# Altium PCB Schroom_plocica.PcbDoc
Units mm, origin at the board's own origin, x right, y up, seen from the top; angles counter-clockwise.
Board outline 152.4 x 101.6 mm, 2 copper layers (Top Layer, Bottom Layer); 54 components, 43 nets, 200 pads, 48 vias.
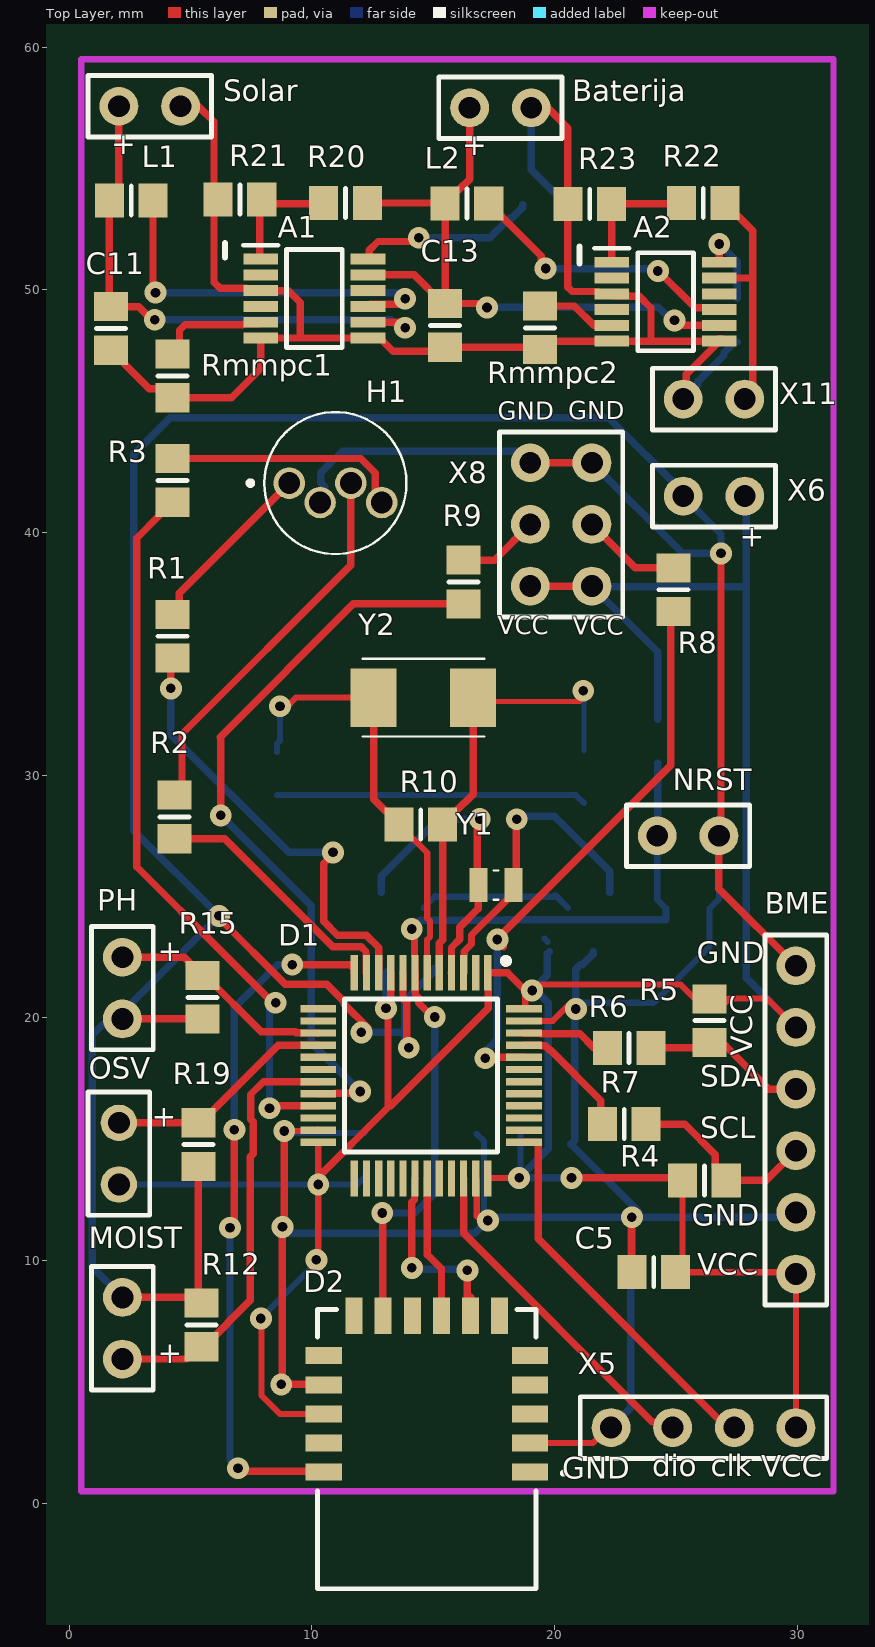
[diagram p0: Top Layer view]
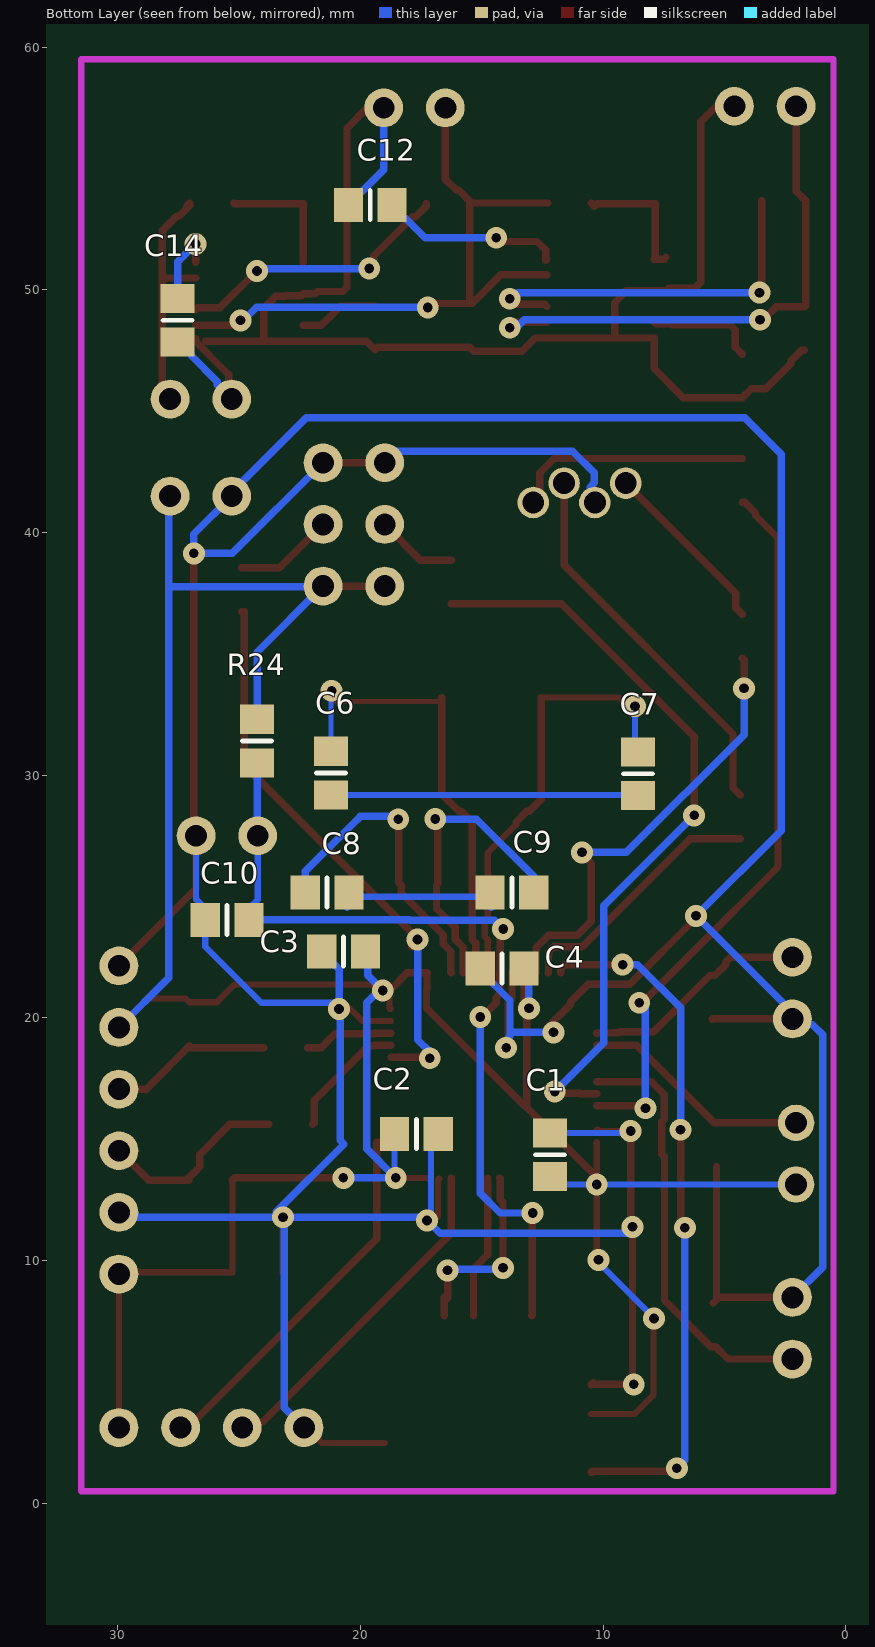
[diagram p1: Bottom Layer view, seen from below]

## Layer stack, top to bottom
Top Solder: solder mask 0.0102, Solder Resist, Dk 3.5
Top Layer: signal copper 0.0356
Dielectric 1: dielectric 0.32, FR-4, Dk 4.8
Bottom Layer: signal copper 0.0356
Bottom Solder: solder mask 0.0102, Solder Resist, Dk 3.5

## Board outline
-30.1,-31.347 122.3,-31.347 122.3,70.253 -30.1,70.253

## Design rules (kind name [scope] priority, off if disabled: settings)
Clearance [All] p1: gap=0.178 ignorepadtopadclearanceinfootprint=TRUE
PolygonConnect [All] p1: connectstyle=Relief reliefconductorwidth=0.254 reliefentries=4 polygonreliefangle="90 Angle" airgapwidth=0.254
RoutingVias [All] p1: holewidth=0.711 width=1.27 viastyle="Through Hole" minholewidth=0.711 minwidth=1.27 maxholewidth=0.711 maxwidth=1.27
SolderMaskExpansion [All] p1: expansion=0.102 istentingtop=FALSE
Width [All] p1: maxlimit=1.016 minlimit=0.203 preferedwidth=0.305 minimp=50.000000 maximp=50.000000 favimp=50.000000
30 further rules are at their usual default settings.

## Components (designator, comment, footprint, x,y, rotation, side; value= is the part's Value field where it differs from the comment)
A1 "LTC3105" SOP65P490X110-12N 10.101,49.64 r0 top
A2 "LTC3105" SOP65P490X110-12N 24.577,49.511 r0 top
Baterija "Baterija" HDR1X2#1 19.04,57.5 r180 top (schematic designator X10)
BME "BME280" HDR1X6 29.947,9.449 r90 top (schematic designator X1)
C1 "100n" 6-0805_N 12.192,14.362 r270 bottom value=100pF
C2 "100n" 6-0805_N 17.693,15.215 r0 bottom value=100pF
C3 "100n" 6-0805_N 20.69,22.733 r180 bottom value=100pF
C4 "10n" 6-0805_N 14.159,22.047 r180 bottom value=100pF
C5 "100n" 6-0805_N 24.09,9.525 r0 top value=100pF
C6 "12p5" 6-0805_N 21.209,30.088 r90 bottom value=100pF
C7 "12p5" 6-0805_N 8.56,30.063 r90 bottom value=100pF
C8 "12p5" 6-0805_N 21.372,25.171 r0 bottom value=100pF
C9 "12p5" 6-0805_N 13.756,25.171 r180 bottom value=100pF
C10 "100n" 6-0805_N 25.491,24.04 r180 bottom value=100pF
C11 "10u" 6-0805_N 1.719,48.409 r90 top value=100pF
C12 "1u" 6-0805_N 19.591,53.5 r180 bottom value=100pF
C13 "10u" 6-0805_N 15.491,48.536 r90 top value=100pF
C14 "1u" 6-0805_N 27.528,48.749 r90 bottom value=100pF
D1 "STM32F103C8T6" QFP50P900X900X160-48N 14.502,17.627 r270 top
D2 "RN4871-I_RM128" RN4871 14.74,7.983 r180 top
H1 "RGB LED" HV5RGB25 9.068,42.037 r0 top
L1 "10u" 6-0805_N 2.557,53.678 r0 top value=10mH
L2 "10u" 6-0805_N 16.391,53.551 r0 top value=10mH
MOIST "vlaga" HDR1X2#1 2.197,5.947 r90 top (schematic designator X2)
NRST "NRST" HDR1X2#1 24.232,27.508 r0 top (schematic designator X7)
OSV "10k" HDR1X2#2 2.049,15.68 r270 top value=1K (schematic designator R18)
PH "PH" HDR1X2#1 2.197,22.5 r270 top (schematic designator X3)
R1 "1k" 6-0805_N 4.267,35.727 r90 top value=1K
R2 "2k" 6-0805_N 4.343,28.285 r270 top value=1K
R3 "3k" 6-0805_N 4.267,42.15 r270 top value=1K
R4 "4k7" 6-0805_N 26.173,13.31 r180 top value=1K
R5 "4k7" 6-0805_N 26.391,19.888 r90 top value=1K
R6 "0.1k" 6-0805_N 23.074,18.771 r0 top value=1K
R7 "0.1K" 6-0805_N 22.871,15.621 r0 top value=1K
R8 "100k" 6-0805_N 24.892,37.643 r270 top value=1K
R9 "100k" 6-0805_N 16.256,37.962 r90 top value=1K
R10 "1M" 6-0805_N 14.489,27.965 r180 top value=1K
R12 "700" 6-0805_N 5.461,7.355 r90 top value=1K
R15 "700" 6-0805_N 5.5,20.85 r270 top value=1K
R19 "10k" 6-0805_N 5.326,14.78 r90 top value=1K
R20 "1M" 6-0805_N 11.386,53.577 r0 top value=1K
R21 "301k" 6-0805_N 7.036,53.721 r180 top value=1K
R22 "1M" 6-0805_N 26.126,53.577 r0 top value=1K
R23 "437k" 6-0805_N 21.452,53.543 r180 top value=1K
R24 "4k7" 6-0805_N 24.257,31.405 r270 bottom value=1K
Rmmpc1 "400k" 6-0805_N 4.259,46.454 r90 top value=1K
Rmmpc2 "0" 6-0805_N 19.398,48.435 r90 top value=1K
Solar "Solar" HDR1X2#1 4.589,57.564 r180 top (schematic designator X9)
X5 "Programator" HDR1X4 29.947,3.124 r180 top
X6 "Ulaz_3,3V" HDR1X2#1 27.84,41.5 r180 top
X8 "Header 3X2" HDR2X3 21.539,37.795 r90 top
X11 "izlaz 3,3V" HDR1X2#1 25.3,45.5 r0 top
Y1 "ABS06-127-32.768KHZ-T" ABS0612732768KHZT 17.587,25.475 r180 top
Y2 "CX5032GA08000H0PST02" CX5032GA08000H0PST02 14.598,33.198 r180 top

## Footprints (in the part's own frame and the unit in brackets; to place one, negate y for a bottom-side part, rotate by r counter-clockwise, add the part's x,y. Pads: shape width x height; smd on the part's side, far side on the other; paste and mask are expansions set on the pad)
6-0805_N [mm] "Chip Resistor, Body 2.0x1.2mm, IPC Medium Density"
  rect 1.2x1.4 smd: 1(-0.9,0) 2(0.9,0)
  silkscreen extent 0,-0.6 0,0.6, body extent -1.07,-0.7 1.07,0.7, height 0.7
ABS0612732768KHZT [mm]
  rect 0.75x1.4 smd: 1(-0.725,0) 2(0.725,0)
  silkscreen extent -0.1,-0.6 0.1,0.6
CX5032GA08000H0PST02 [mm]
  rect 1.9x2.4 smd: 1(-2.05,0) 2(2.05,0)
  silkscreen extent -2.5,-1.6 2.5,1.6, body extent -2.81,-1.6 2.81,1.6, height 1.1
HDR1X2#1 [mm] "Connector; Header; 2 Position"
  round 1.6 hole 0.9: 1(0,0) 2(2.54,0)
  silkscreen extent -1.27,-1.27 3.81,1.27
HDR1X2#2 [mm] "Connector; Header; 2 Position"
  round 1.5 hole 0.9: 1(0,0) 2(2.54,0)
  silkscreen extent -1.27,-1.27 3.81,1.27
HDR1X4 [mm] "Connector; Header; 4 Position"
  round 1.6 hole 0.9: 1(0,0) 2(2.54,0) 3(5.08,0) 4(7.62,0)
  silkscreen extent -1.27,-1.27 8.89,1.27
HDR1X6 [mm] "Connector; Header; 6 Position"
  round 1.6 hole 0.9: 1(0,0) 2(2.54,0) 3(5.08,0) 4(7.62,0) 5(10.16,0) 6(12.7,0)
  silkscreen extent -1.27,-1.27 13.97,1.27
HDR2X3 [mm] "Connector; Header; 3x2 Position"
  round 1.6 hole 0.9: 1(0,0) 2(0,2.54) 3(2.54,0) 4(2.54,2.54) 5(5.08,0) 6(5.08,2.54)
  silkscreen extent -1.27,-1.27 6.35,3.81
HV5RGB25 [mm]
  round 1.3 hole 0.9: 1(0,0) 2(1.27,-0.8) 3(2.54,0) 4(3.81,-0.8)
  silkscreen extent -1.7,-2.92 4.83,2.92
QFP50P900X900X160-48N [mm]
  rect 1.475x0.3 smd: 1(-4.238,2.75) 2(-4.238,2.25) 3(-4.238,1.75) 4(-4.238,1.25) 5(-4.238,0.75) 6(-4.238,0.25) 7(-4.238,-0.25) 8(-4.238,-0.75) 9(-4.238,-1.25) 10(-4.238,-1.75) 11(-4.238,-2.25) 12(-4.238,-2.75) 25(4.238,-2.75) 26(4.238,-2.25) 27(4.238,-1.75) 28(4.238,-1.25) 29(4.238,-0.75) 30(4.238,-0.25) 31(4.238,0.25) 32(4.238,0.75) 33(4.238,1.25) 34(4.238,1.75) 35(4.238,2.25) 36(4.238,2.75)
  rect 0.3x1.475 smd: 13(-2.75,-4.238) 14(-2.25,-4.238) 15(-1.75,-4.238) 16(-1.25,-4.238) 17(-0.75,-4.238) 18(-0.25,-4.238) 19(0.25,-4.238) 20(0.75,-4.238) 21(1.25,-4.238) 22(1.75,-4.238) 23(2.25,-4.238) 24(2.75,-4.238) 37(2.75,4.238) 38(2.25,4.238) 39(1.75,4.238) 40(1.25,4.238) 41(0.75,4.238) 42(0.25,4.238) 43(-0.25,4.238) 44(-0.75,4.238) 45(-1.25,4.238) 46(-1.75,4.238) 47(-2.25,4.238) 48(-2.75,4.238)
  silkscreen extent -4.85,-3.15 3.15,3.63, body extent -4.5,-4.5 4.5,4.5, height 1.6
RN4871 [mm]
  rect 1.5x0.7 smd: 1(-4.25,6.7) 2(-4.25,5.5) 3(-4.25,4.3) 4(-4.25,3.1) 5(-4.25,1.9) 12(4.25,1.9) 13(4.25,3.1) 14(4.25,4.3) 15(4.25,5.5) 16(4.25,6.7)
  rect 0.7x1.5 smd: 6(-3,0.25) 7(-1.8,0.25) 8(-0.6,0.25) 9(0.6,0.25) 10(1.8,0.25) 11(3,0.25)
  silkscreen extent -5.67,0 4.5,11.5
SOP65P490X110-12N [mm]
  rect 1.425x0.45 smd: 1(-2.212,1.625) 2(-2.212,0.975) 3(-2.212,0.325) 4(-2.212,-0.325) 5(-2.212,-0.975) 6(-2.212,-1.625) 7(2.212,-1.625) 8(2.212,-0.975) 9(2.212,-0.325) 10(2.212,0.325) 11(2.212,0.975) 12(2.212,1.625)
  silkscreen extent -2.93,-2.02 1.15,2.2, body extent -2.45,-2.02 2.45,2.02, height 1.1

## Part data
Baterija MOIST PH Solar X6 X11: library part "Header 2", "Header, 2-Pin", LatestRevisionDate=17-Jul-2002, LatestRevisionNote="Re-released for DXP Platform.", Publisher="Altium Limited"
C1 C2 C3 C4 C5 C6 C7 C8 C9 C10 C11 C12 C13 C14: library part Cap, "Capacitor", LatestRevisionDate=17-Jul-2002, LatestRevisionNote="Re-released for DXP Platform.", PackageDescription="Radial Cap, Thru-Hole; 2 Leads; 0.3 in Pin Spacing", PackageReference=RAD-0.3, Published=8-Jun-2000, Publisher="Altium Limited"
D1: "Integrated Circuit", Manufacturer_Name=STMicroelectronics, Mouser Part Number=511-STM32F103C8T6, RS Part Number=0402279P, Allied_Number=70390993, Allied Price/Stock=http://www.alliedelec.com/stmicroelectronics-stm32f103c8t6/70390993/, Datasheet Link=http://www.st.com/st-web-ui/static/active/en/resource/technical/document/datasheet/CD00161566.pdf, Height=1.6mm, Manufacturer_Part_Number=STM32F103C8T6, Mouser Price/Stock=https://www.mouser.com/Search/Refine.aspx?Keyword=511-STM32F103C8T6, RS Price/Stock=http://uk.rs-online.com/web/p/products/0402279P
D2: "Integrated Circuit", Manufacturer_Name=Microchip, Manufacturer_Part_Number=RN4871-I/RM128, Mouser Part Number=579-RN4871-I/RM128, RS Part Number=1372666P, Datasheet Link=http://ww1.microchip.com/downloads/en/DeviceDoc/50002489C.pdf, Mouser Price/Stock=https://www.mouser.com/Search/Refine.aspx?Keyword=579-RN4871-I%2FRM128, RS Price/Stock=http://uk.rs-online.com/web/p/products/1372666P
H1: library part APTF1616LSEEZGKQBKC, "LED", Manufacturer_Name=Kingbright, Mouser Part Number=604-APTF1616LSEEZGKQ, Allied_Number=70820333, Allied Price/Stock=https://www.alliedelec.com/kingbright-aptf1616lseezgkqbkc/70820333/, Datasheet Link=https://componentsearchengine.com/Datasheets/1/APTF1616LSEEZGKQBKC.pdf, Manufacturer_Part_Number=APTF1616LSEEZGKQBKC, Mouser Price/Stock=https://www.mouser.com/Search/Refine.aspx?Keyword=604-APTF1616LSEEZGKQ
L1 L2: library part Inductor, "Inductor", Code_IEC=1005, Code_JEITA=0402, LatestRevisionDate=29-May-2009, LatestRevisionNote="IPC-7351 Footprint Added.", PackageDescription="Chip Inductor", PackageReference=0402-A, Published=8-Jun-2000, Publisher="Altium Limited"
NRST: library part jumper
OSV: library part "Res Adj2", "Variable Resistor", LatestRevisionDate=17-Jul-2002, LatestRevisionNote="Re-released for DXP Platform.", PackageDescription="Axial Device, Thru-Hole; 2 Leads; 0.6 in Pin Spacing", PackageReference=AXIAL-0.6, Published=8-Jun-2000, Publisher="Altium Limited", Set Position=0.5
R1 R2 R3 R4 R5 R6 R7 R8 R9 R10 R12 R15 R19 R20 R21 R22 R23 R24 Rmmpc1 Rmmpc2: library part Res2, "Resistor", LatestRevisionDate=17-Jul-2002, LatestRevisionNote="Re-released for DXP Platform.", PackageDescription="Axial Device, Thru-Hole; 2 Leads; 0.4 in Pin Spacing", PackageReference=AXIAL-0.4, Published=8-Jun-2000, Publisher="Altium Limited"
X5: library part "Header 4", "Header, 4-Pin", LatestRevisionDate=17-Jul-2002, LatestRevisionNote="Re-released for DXP Platform.", Publisher="Altium Limited"
X8: "Header, 3-Pin, Dual row", LatestRevisionDate=17-Jul-2002, LatestRevisionNote="Re-released for DXP Platform.", Publisher="Altium Limited"
Y1: "Crystal or Oscillator", Manufacturer_Name=ABRACON, Mouser Part Number=815-ABS0612732.768KT, RS Part Number=1753472P, Datasheet Link=https://abracon.com/datasheets/ABS06-127-32.768kHz-T.pdf, Height=0.6mm, Manufacturer_Part_Number=ABS06-127-32.768KHZ-T, Mouser Price/Stock=https://www.mouser.com/Search/Refine.aspx?Keyword=815-ABS0612732.768KT, RS Price/Stock=http://uk.rs-online.com/web/p/products/1753472P
Y2: "Crystal or Oscillator", Manufacturer_Name="Kyocera Electronic Components", Mouser Part Number=581-CX5032GA08H0PST, Datasheet Link=https://media.digikey.com/pdf/Data%20Sheets/AVX%20PDFs/CX5032GA08000H0PST02_Spec.pdf, Height=1mm, Manufacturer_Part_Number=CX5032GA08000H0PST02, Mouser Price/Stock=https://www.mouser.com/Search/Refine.aspx?Keyword=581-CX5032GA08H0PST

## Via types
v1: diameter 0.9, hole 0.4, Top Layer to Bottom Layer, 48 vias

## Nets (pads, with @x,y where several pads share a name; then routed paths per layer and width w, separated by ;. In a path a pad name is that pad's centre, name@x,y a point inside that pad or via, vN(x,y) a via of type N, cw(c..) or ccw(c..) an arc to the next point about the centre after c; other vN are vias at no path point)
AGND1: A1.3 A1.6 A1.7 A2.3 A2.6 A2.7 Baterija.1 C11.1 C12.1 C13.1 C14.1 R21.2 R23.2 Rmmpc1.1 Rmmpc2.1 Solar.1 X11.1 | length 66.3
  Top Layer w0.305: C11.1 1.819,47.509 2.267,47.062 2.267,46.962 3.299,45.93 3.883,45.93 Rmmpc1.1 6.692,45.554 7.899,46.761 7.899,48.004 A1.6 9.55,48.015 ; Solar.1 5.326,57.564 5.969,56.921 5.969,50.318 6.227,50.059 7.307,50.059 7.402,49.965 A1.3 9.04,49.965 9.525,49.479 9.525,48.04 9.55,48.015 ; Baterija.1 19.716,57.5 20.552,56.664 R23.2 20.552,50.109 20.731,49.931 21.783,49.931 21.878,49.836 A2.3 22.438,49.763 23.081,49.763 23.104,49.741 23.487,49.741 23.974,49.254 23.974,47.886 ; X11.1 25.432,45.632 25.432,46.514 26.898,47.981 26.789,47.981 A2.7 ; A2.7@26.374,47.886 23.974,47.886 ; 9.55,48.015 A1.7 12.801,48.015 13.343,47.473 15.328,47.473 C13.1 19.296,47.636 Rmmpc2.1 19.749,47.886 A2.6 23.974,47.886
  Bottom Layer w0.305: Baterija.1 19.04,54.951 19.943,54.048 20.043,54.048 20.491,53.6 C12.1 ; X11.1 25.898,46.098 25.898,46.219 26.98,47.301 26.98,47.401 27.428,47.849 C14.1
BLUE: D1.21 R3.2 | length 30.6
  Top Layer w0.305: R3.2 4.167,41.25 3.72,40.802 3.72,40.702 2.794,39.776 2.794,26.219 6.333,22.68 6.337,22.68 6.53,22.487 6.53,22.483 8.389,20.625 v1(8.509,20.625) ; v1(8.255,16.281) 8.159,16.377 D1.21
  Bottom Layer w0.305: v1(8.255,16.281) 8.255,20.625 v1(8.509,20.625)
BOOT0: D1.44 R8.2 | length 24.1
  Top Layer w0.305: v1(17.145,18.339) 17.183,18.377 D1.44 ; v1(17.644,23.23) 17.644,23.166 17.882,22.929 17.595,23.216 24.792,30.413 24.792,36.743 R8.2
  Bottom Layer w0.305: v1(17.145,18.339) 17.145,18.6 17.644,19.099 v1(17.644,23.23)
BOOT1: D1.20 R9.1 | length 31.1
  Top Layer w0.305: v1(6.248,28.346) 6.248,31.547 6.223,31.572 11.713,37.062 R9.1 ; D1.20 10.266,16.879 10.938,16.879 10.955,16.897 11.918,16.897 v1(11.989,16.967)
  Bottom Layer w0.305: v1(6.248,28.346) 9.975,24.62 9.975,18.981 v1(11.989,16.967)
GND: BME.2 BME.6 C1.1 C2.1 C3.1 C4.1 C5.1 C10.1 D1.8 D1.23 D1.35 D1.47 D2.2 D2.13 H1.2 MOIST.2 NRST.2 PH.2 R12.2 R15.2 R19.1 X5.4 X6.2 X8.5 X8.6 | length 221.4
  Top Layer w0.254: v1(8.865,15.342) 10.182,15.342 10.241,15.4 D1.23 ; D1.35 16.797,13.344 16.797,11.829 16.967,11.659 v1@17.247,11.659 ; v1@17.252,11.506 17.094,11.506 v1@17.247,11.659 ; v1(17.252,11.659) v1@17.247,11.659 ; D1.47 19.928,19.877 20.676,20.625 v1@20.828,20.625 ; D2.2 21.579,2.483 22.22,3.124 X5.4
  Top Layer w0.305: MOIST.2 5.229,8.487 R12.2@5.326,8.39 ; PH.2 5.49,19.96 R15.2 ; R19.1 R12.2@5.326,8.39 ; R12.2 R12.2@5.326,8.39 ; v1(6.172,24.206) 6.172,24.117 8.902,21.387 10.608,21.387 11.331,20.664 11.331,20.571 v1@12.298,19.604 ; v1(8.865,15.342) 8.865,11.468 v1(8.788,11.392) 8.788,5.125 8.566,4.902 v1(8.738,4.902) 10.338,4.902 10.404,4.969 D2.13 ; D1.8 13.754,21.863 13.754,20.852 13.789,20.817 13.789,20.766 13.912,20.643 13.912,18.6 14.072,18.76 14.061,18.771 v1(13.995,18.771) ; X8.6 X8.5 ; v1(23.187,11.786) 23.187,9.572 23.165,9.55 C5.1 ; v1(26.86,39.141) 26.86,27.419 26.772,27.33 26.772,25.324 BME.6
  Bottom Layer w0.254: v1@8.713,15.262 C1.1 ; C2.1 17.094,14.913 v1@17.094,11.709 ; v1@20.879,20.625 24.079,20.625 26.391,22.936 C10.1 26.391,24.511 26.772,24.892 NRST.2
  Bottom Layer w0.305: MOIST.2 0.957,9.727 0.957,19.304 1.385,19.731 1.968,19.731 PH.2 2.197,20.231 v1(6.172,24.206) 2.667,27.711 2.667,43.231 4.166,44.729 22.224,44.729 25.3,41.654 X6.2 26.86,39.94 v1(26.86,39.141) 25.273,39.141 X8.5 ; v1(8.788,11.392) 8.788,11.379 8.763,11.354 8.992,11.125 16.718,11.125 v1(17.252,11.659) 17.379,11.786 v1(23.187,11.786) v1@23.47,11.786 ; H1.2 10.538,41.437 10.538,41.873 10.363,42.048 10.363,42.457 11.264,43.358 18.517,43.358 X8.6 ; v1(12.04,19.406) 13.833,19.406 ; v1(13.995,18.771) 13.882,18.884 13.882,19.199 13.833,19.247 13.833,19.406 ; C4.1 15.059,21.947 13.833,20.722 13.836,20.719 13.836,20.073 13.833,20.071 13.833,19.406 ; v1@20.828,20.625 20.828,14.954 20.676,14.802 23.47,12.008 v1@23.47,11.786 ; v1(20.879,20.371) 20.879,20.625 20.879,22.007 21.057,22.185 21.142,22.185 21.59,22.633 C3.1 ; X5.4 23.139,3.937 23.139,11.455 v1@23.47,11.786 ; BME.2 29.743,11.786 v1@23.47,11.786
GREEN: D1.11 R2.2 | length 10.7
  Top Layer w0.305: R2.2 6.407,27.385 10.859,22.933 12.038,22.933 12.232,22.739 12.232,22.606 12.249,22.606 12.249,21.867 D1.11
Moist: D1.19 MOIST.1 R12.1 | length 17.9
  Top Layer w0.305: MOIST.1 4.853,5.947 5.361,6.455 R12.1 5.561,6.455 7.468,8.362 7.468,14.285 7.587,14.404 7.587,15.716 7.475,15.828 7.475,16.847 8.007,17.379 10.261,17.379 D1.19
NetA1_1: A1.1 R20.1 R21.1 | length 5.5
  Top Layer w0.305: A1.1@7.409,51.337 7.481,51.265 A1.1 7.849,51.305 7.849,53.543 10.265,53.543 10.359,53.45 R20.1
NetA1_5: A1.5 Rmmpc1.2 | length 4.6
  Top Layer w0.305: Rmmpc1.2 4.547,47.641 4.547,48.335 4.781,48.57 7.151,48.57 7.173,48.592 7.817,48.592 A1.5
NetA1_8: A1.8 C11.2 L1.1 Solar.2 | length 22.6
  Top Layer w0.305: Solar.2 2.049,54.07 L1.1 1.657,49.371 C11.2 2.869,49.309 3.411,48.768 v1(3.531,48.768) ; A1.8 13.616,48.665 v1(13.843,48.438)
  Bottom Layer w0.305: v1(3.531,48.768) 13.252,48.768 13.582,48.438 v1(13.843,48.438)
NetA1_9: A1.9 L1.2 | length 15.9
  Top Layer w0.305: L1.2 3.457,49.984 v1(3.556,49.886) ; A1.9 12.408,49.409 13.621,49.409 v1(13.843,49.632)
  Bottom Layer w0.305: v1(3.556,49.886) 13.509,49.886 13.763,49.632 v1(13.843,49.632)
NetA1_11: A1.11 A2.8 Baterija.2 C13.2 L2.1 R20.2 | length 27.1
  Top Layer w0.305: R20.2 15.466,53.577 L2.1 ; A1.11 14.212,50.615 15.391,49.436 C13.2 ; Baterija.2 16.5,54.56 16.039,54.099 15.939,54.099 15.491,53.651 L2.1 ; v1(17.221,49.276) 17.061,49.436 C13.2 ; v1(24.943,48.743) 25.149,48.536 A2.8 ; C13.2 L2.1
  Bottom Layer w0.305: v1(17.221,49.276) 24.282,49.276 24.815,48.743 v1(24.943,48.743)
NetA1_12: A1.12 C12.2 | length 7.7
  Top Layer w0.305: A1.12 12.37,51.208 12.37,51.638 12.725,51.994 14.249,51.994 v1(14.402,52.146)
  Bottom Layer w0.305: v1(14.402,52.146) 17.337,52.146 18.143,52.952 18.243,52.952 18.691,53.4 C12.2
NetA2_1: A2.1 R22.1 R23.1 | length 5.3
  Top Layer w0.305: A2.1 22.352,51.149 R23.1 25.192,53.543 R22.1
NetA2_5: A2.5 Rmmpc2.2 | length 3.3
  Top Layer w0.305: Rmmpc2.2 20.812,49.335 21.611,48.536 A2.5
NetA2_9: A2.9 L2.2 | length 11.6
  Top Layer w0.305: L2.2 17.291,53.451 17.739,53.004 17.839,53.004 19.45,51.393 19.45,51.061 v1(19.634,50.876) ; v1(24.257,50.775) 24.276,50.775 25.792,49.259 26.716,49.259 A2.9
  Bottom Layer w0.305: v1(19.634,50.876) 24.155,50.876 v1(24.257,50.775)
NetA2_11: A2.11 R22.2 X11.2 | length 10.3
  Top Layer w0.305: A2.11 28.169,50.486 ; R22.2@27.153,53.45 R22.2 27.026,53.477 27.473,53.029 27.573,53.029 28.169,52.434 28.169,50.486 ; X11.2 27.84,45.77 28.169,46.098 28.169,50.486
NetA2_12: A2.12 C14.2 | length 3.3
  Top Layer w0.305: A2.12 v1(26.789,51.892)
  Bottom Layer w0.305: v1(26.789,51.892) 27.528,51.153 C14.2
NetC6_1: C6.1 C7.1 | length 12.8
  Bottom Layer w0.254: C7.1@8.56,29.185 20.882,29.185 C6.1@21.209,28.858
NetC8_1: C8.1 C9.1 | length 6.3
  Bottom Layer w0.254: C9.1@14.605,24.536 C9.1@15.088,25.019 ; C9.1@15.113,24.994 C8.1@20.019,24.994 ; C8.1@20.019,25.07 C8.1@20.552,24.536
NetD1_45: D1.45 R7.1 | length 5.1
  Top Layer w0.305: D1.45 18.742,18.875 19.414,18.875 19.431,18.857 19.614,18.857 19.807,18.664 19.843,18.664 21.907,16.6 21.907,15.685 R7.1
NetD1_46: D1.46 R6.1 | length 3.7
  Top Layer w0.305: D1.46 18.742,19.375 19.414,19.375 19.431,19.357 21.031,19.357 21.618,18.771 R6.1
NetH1_1: H1.1 R1.2 | length 7.4
  Top Layer w0.305: R1.2 4.536,36.896 4.536,37.505 H1.1
NetH1_3: H1.3 R2.1 | length 15.9
  Top Layer w0.305: R2.1 4.648,29.489 4.648,31.699 11.608,38.659 H1.3
NetH1_4: H1.4 R3.1 | length 9.9
  Top Layer w0.305: R3.1 12.017,43.05 12.613,42.453 12.613,41.785 12.878,41.52 H1.4
NetR8_1: R8.1 X8.3 | length 4.1
  Top Layer w0.305: X8.3 23.332,38.543 R8.1
NetR9_2: R9.2 X8.4 | length 3.4
  Top Layer w0.305: R9.2 17.526,38.862 X8.4
NRST: C10.2 D1.7 D2.10 NRST.1 R24.2 | length 35.2
  Top Layer w0.305: v1(12.903,11.963) 12.922,11.945 12.922,7.751 D2.10 ; v1@14.204,23.54 14.204,23.331 14.232,23.304 14.232,22.557 14.249,22.539 14.249,21.867 D1.7 14.254,21.863 14.254,21.034 14.271,21.017 14.271,20.966 14.395,20.843 14.395,20.632 14.986,20.041 v1(15.062,20.041)
  Bottom Layer w0.254: NRST.1 24.232,24.87 C10.2@24.591,24.511
  Bottom Layer w0.305: v1(12.903,11.963) 14.249,11.963 15.062,12.776 v1(15.062,20.041) ; v1(14.119,23.666) 14.474,24.021 17.957,24.021 17.975,24.04 C10.2 C10.2@24.591,24.511 ; NRST.1 24.257,27.534 R24.2
OSC32_IN: C8.2 D1.3 Y1.1 | length 12.5
  Top Layer w0.305: D1.3 16.271,21.885 16.271,22.739 16.579,23.047 16.579,23.417 18.312,25.15 Y1.1 18.415,25.578 18.415,27.737
  Bottom Layer w0.305: v1(18.44,28.185) 18.44,28.278 18.473,28.311 20,28.311 20.052,28.259 20.052,28.245 20.245,28.051 20.26,28.051 22.272,26.038 C8.2
OSC32_OUT: C9.2 D1.4 Y1.2 | length 12.1
  Top Layer w0.305: D1.4 15.754,21.867 15.754,22.904 16.096,23.247 16.096,23.742 16.862,24.507 Y1.2 16.815,25.522 16.815,27.737
  Bottom Layer w0.305: C9.2 12.856,25.835 15.215,28.194 v1(16.916,28.194)
OSC_IN: C6.2 D1.5 R10.1 Y2.1 | length 18.7
  Top Layer w0.203: Y2.1@16.8,33.045 21.057,33.045
  Top Layer w0.305: D1.5 15.252,23.084 15.389,23.222 R10.1 15.389,28.065 15.837,28.513 15.937,28.513 16.648,29.224 Y2.1
  Bottom Layer w0.203: v1(21.184,33.481) 21.209,33.455 C6.2
OSC_OUT: C7.2 D1.6 R10.2 Y2.2 | length 18.4
  Top Layer w0.254: v1@8.687,32.791 8.937,32.791 9.344,33.198 Y2.2 ; R10.2 14.753,26.802 14.753,24.1 14.874,23.978 14.874,23.353 14.752,23.231 D1.6
  Top Layer w0.305: Y2.2 12.548,29.007 13.041,28.513 13.141,28.513 13.589,28.065 R10.2
  Bottom Layer w0.254: C7.2 8.56,31.293 8.687,31.42 v1(8.687,32.846)
osvj: D1.16 OSV.1 R19.2 | length 9.5
  Top Layer w0.305: OSV.1 R19.2 5.426,15.68 8.623,18.877 D1.16
P2_0: D1.12 D2.16 | length 28.8
  Top Layer w0.305: v1(6.629,11.354) 6.807,11.532 v1(6.807,15.392) ; v1(6.96,1.448) 7.087,1.321 10.452,1.321 D2.16 ; v1(9.195,22.198) 11.573,22.198 11.752,22.019 D1.12
  Bottom Layer w0.305: v1(6.629,11.354) 6.629,1.778 v1(6.96,1.448) ; v1@6.807,15.24 v1(6.807,15.392) 6.807,20.422 8.583,22.198 v1(9.195,22.198)
PH: D1.15 PH.1 R15.1 | length 9.4
  Top Layer w0.305: PH.1 4.75,22.5 4.952,22.298 4.952,22.198 5.4,21.75 5.6,21.75 7.919,19.431 9.321,19.431 9.355,19.397 9.572,19.397 9.589,19.379 10.261,19.379 D1.15
RED: D1.10 R1.1 | length 18.6
  Top Layer w0.305: v1(4.191,33.579) 4.191,34.751 R1.1 ; v1(10.871,26.822) 10.871,26.743 10.49,26.362 10.49,23.984 11.059,23.415 12.238,23.415 12.749,22.904 12.749,21.867 D1.10
  Bottom Layer w0.305: v1(4.191,33.579) 4.191,31.674 9.042,26.822 v1(10.871,26.822)
SCL: BME.3 R4.1 R7.2 | length 8
  Top Layer w0.305: R7.2 25.375,15.621 26.625,14.37 26.625,13.857 27.073,13.41 R4.1 28.727,13.31 BME.3
SDA: BME.4 R5.1 R6.2 | length 6.7
  Top Layer w0.305: R6.2 26.975,18.771 27.051,18.847 28.829,17.069 BME.4
SYS_JTCK-SWCLK: D1.37 X5.2 | length 15.9
  Top Layer w0.305: D1.37 19.322,14.877 19.325,14.875 19.325,10.901 27.102,3.124 X5.2
SYS_JTMS_SWDIO: D1.34 X5.3 | length 14.2
  Top Layer w0.305: D1.34 16.252,11.13 24.028,3.353 24.638,3.353 X5.3
UART_RX: D1.30 D2.7 | length 8.1
  Top Layer w0.305: v1(14.122,9.703) 14.122,12.405 14.232,12.515 14.232,13.369 D1.30 ; v1(16.408,9.601) 16.408,8.469 16.465,8.413 16.54,8.488 D2.7
  Bottom Layer w0.305: v1(14.122,9.703) 14.173,9.652 16.358,9.652 v1(16.408,9.601)
UART_TX: D1.31 D2.8 | length 5.9
  Top Layer w0.305: D1.31 14.752,10.252 15.34,9.663 D2.8
VCC: BME.1 BME.5 C1.2 C2.2 C3.2 C4.2 C5.2 D1.1 D1.9 D1.24 D1.36 D1.48 D2.14 OSV.2 R4.2 R5.2 R24.1 X5.1 X6.1 X8.1 X8.2 | length 131.5
  Top Layer w0.254: v1(7.899,7.62) 7.925,7.595 7.925,4.445 8.687,3.683 D2.14 ; v1(10.185,10.033) 10.264,10.111 10.264,13.437 D1.24 ; D1.36 17.274,13.411 v1(18.542,13.411) v1@18.644,13.31 ; D1.48 18.773,20.377 18.796,20.4 18.796,21.133 19.043,21.38 25.179,21.38 25.911,20.647 27.051,20.647 27.207,20.803 28.753,20.803 BME.5 ; R4.2 25.273,9.525 29.87,9.525 BME.1 X5.1
  Top Layer w0.305: v1@10.264,13.437 13.139,16.312 13.139,20.034 13.249,20.144 13.249,21.863 D1.9 ; 13.249,16.383 17.274,20.408 17.274,21.171 17.254,21.191 17.254,21.863 D1.1 18.064,21.865 v1@18.796,21.133 ; X8.2 X8.1 ; v1(20.701,13.411) 25.171,13.411 R4.2
  Bottom Layer w0.254: OSV.2 v1@10.119,13.14 ; v1(7.899,7.62) 10.185,9.906 v1(10.185,10.033) ; v1(10.262,13.14) 11.87,13.14 C1.2 ; v1@18.593,13.462 C2.2 ; C3.2@19.587,23.266 C3.2@19.714,23.139 ; v1@10.119,13.14 10.135,13.14 10.127,13.132 v1@10.119,13.14
  Bottom Layer w0.305: v1(13.056,20.396) 13.056,21.384 13.132,21.46 12.902,21.69 C4.2@13.112,21.9 ; v1@19.003,21.12 19.244,21.12 19.736,20.628 19.736,14.605 18.593,13.462 v1(18.542,13.411) v1(20.701,13.411) ; v1(19.075,21.133) 19.697,21.754 19.697,22.64 C3.2 ; X8.1 X8.1@21.565,37.77 ; R24.1 24.257,35.077 X8.1@21.565,37.77 ; X6.1 27.902,41.438 27.902,37.77 ; BME.5 27.902,21.654 27.902,37.77 ; X8.1@21.565,37.77 27.902,37.77
pads on no net: A1.2 A1.4 A1.10 A2.2 A2.4 A2.10 D1.2 D1.13 D1.14 D1.17 D1.18 D1.22 D1.25 D1.26 D1.27 D1.28 D1.29 D1.32 D1.33 D1.38 D1.39 D1.40 D1.41 D1.42 D1.43 D2.1 D2.3 D2.4 D2.5 D2.6 D2.9 D2.11 D2.12 D2.15

## Keep-outs
Keep-Out Layer:
  lines w0.254: 0.5,58.5 0.5,59.5 ; 0.5,58.5 0.5,59.5 ; 0.5,58.5 0.5,0.5 30.5,0.5 31.5,0.5 31.5,59.5 0.5,59.5

## Silkscreen, mask and mechanical layers (free items; w line width, h text height)
Top Overlay:
  lines w0.254: 6.426,51.333 6.426,51.918 ; 21.031,51.079 21.031,51.791
  text "+" at 1.727,55.27 h1.52
  text "+" at 16.205,55.245 h1.52
  text "+" at 27.635,39.116 h1.52
  text "+" at 3.658,22.022 h1.52
  text "GND" at 25.857,21.946 h1.52
  text "VCC" at 28.448,18.44 h1.52 r90
  text "SDA" at 26.01,16.847 h1.52
  text "+" at 3.404,15.215 h1.52
  text "SCL" at 26.01,14.732 h1.52
  text "GND" at 25.654,11.13 h1.52
  text "VCC" at 25.883,9.119 h1.52
  text "+" at 3.658,5.461 h1.52
  text "dio" at 24.028,0.813 h1.52
  text "clk" at 26.441,0.813 h1.52
  text "VCC" at 28.524,0.787 h1.52
  text "GND" at 20.32,0.711 h1.52
Mechanical 1:
  lines w0.254: 0,0 32,0 32,60 0,60 0,0
Drill Drawing:
  text ".Legend" at 37.059,3.048 h1.52

## Text inside footprints (layer, text, board x,y; h text height)
X8: Top Overlay "VCC" at 20.752,35.535 h1.27; Top Overlay "VCC" at 17.652,35.56 h1.27; Top Overlay "GND" at 20.574,44.425 h1.27; Top Overlay "GND" at 17.652,44.399 h1.27